# Altium PCB lv_controller.PcbDoc
Units mil, origin at the board's own origin, x right, y up, seen from the top; angles counter-clockwise.
Board outline 3360 x 3365 mil, 2 copper layers (Top Layer, Bottom Layer); 72 components, 59 nets, 282 pads, 68 vias.
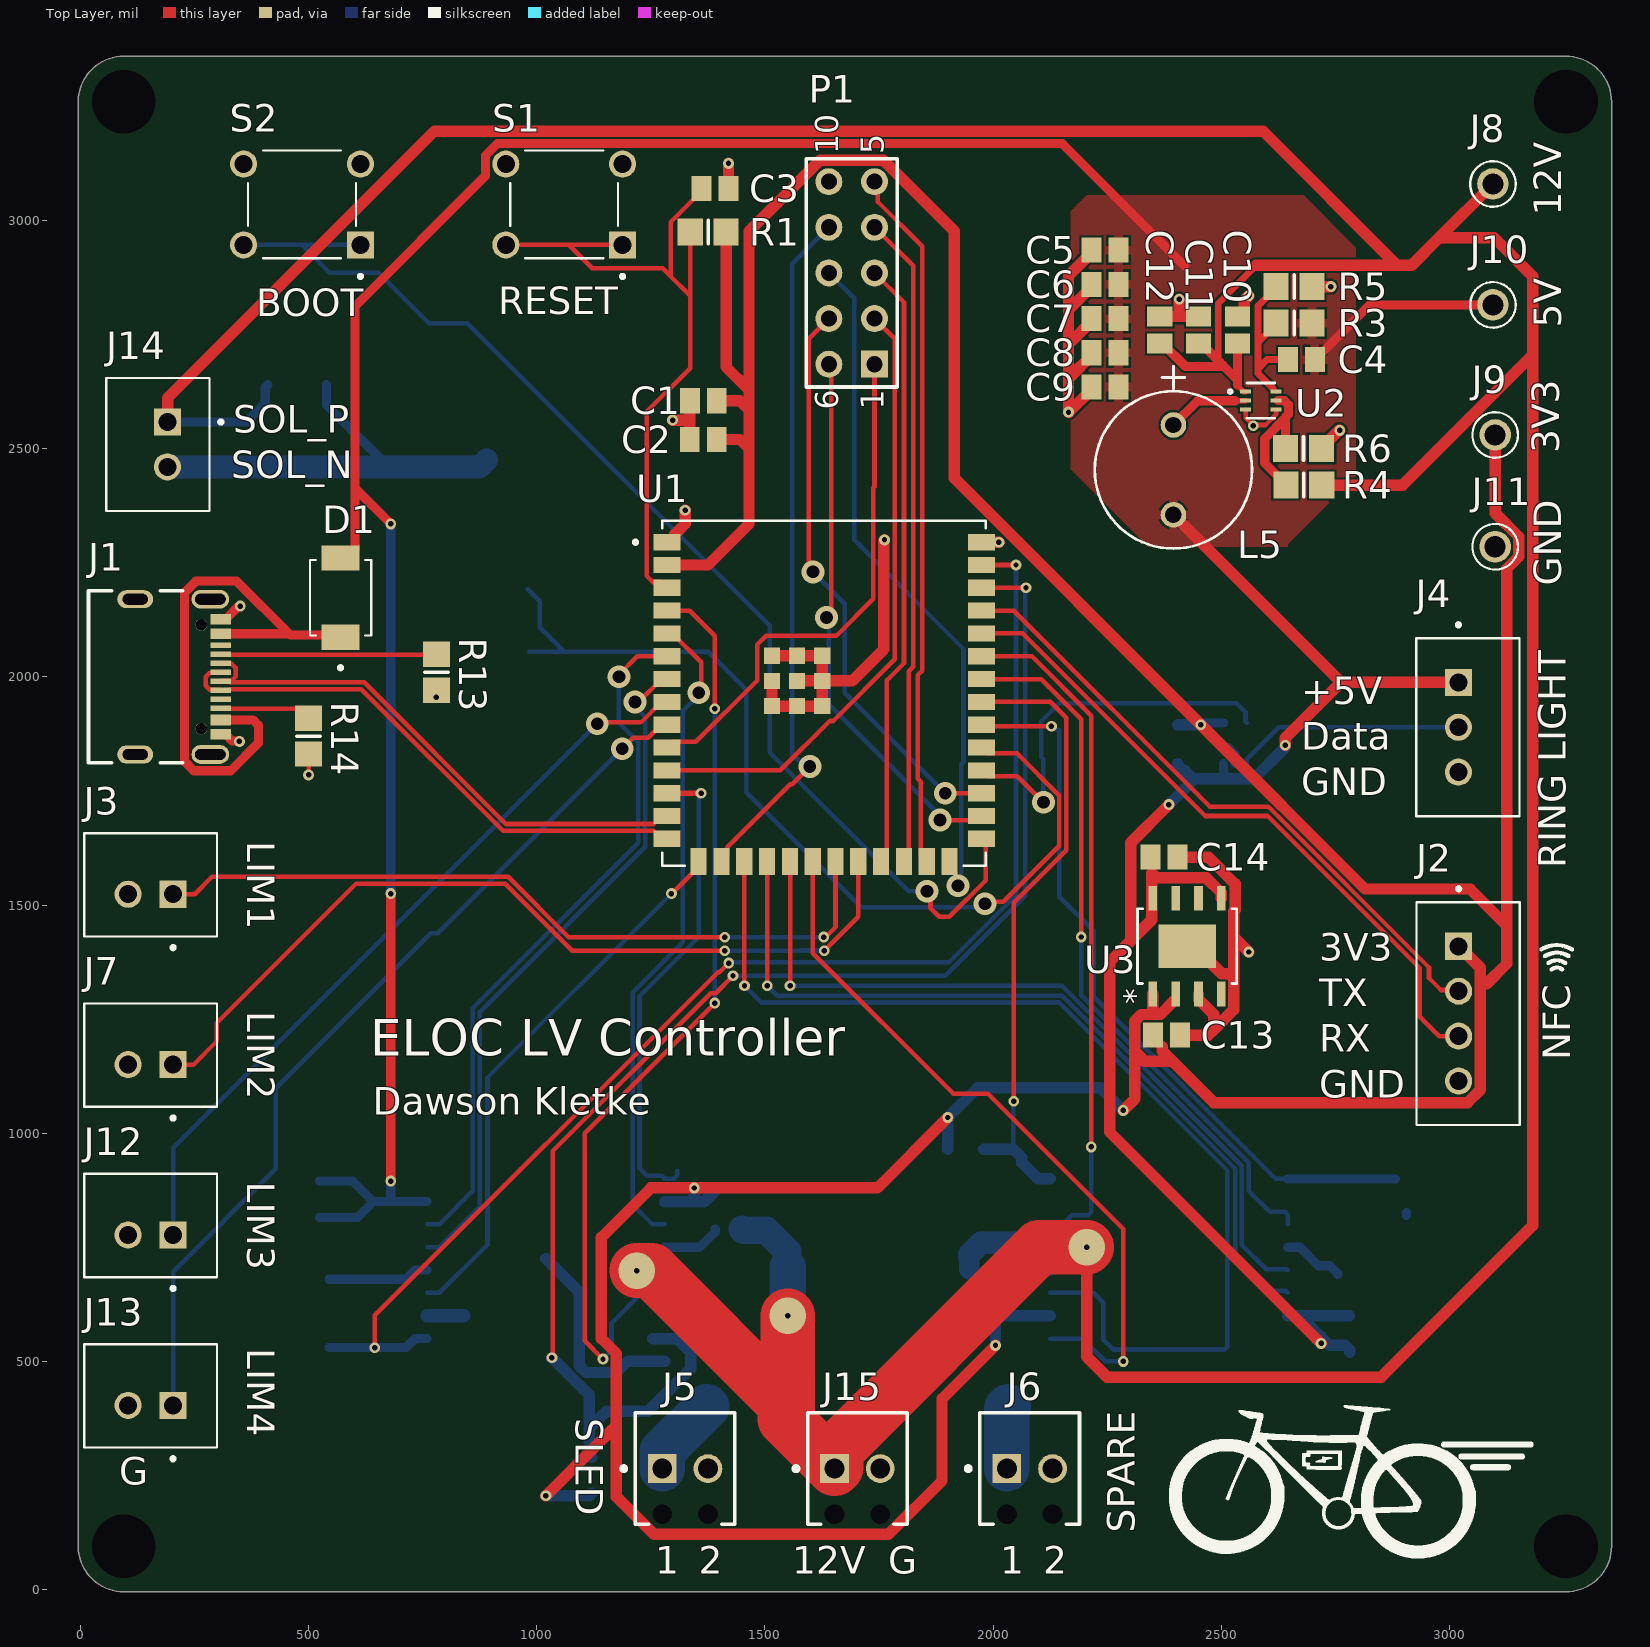
[diagram p0: Top Layer view]
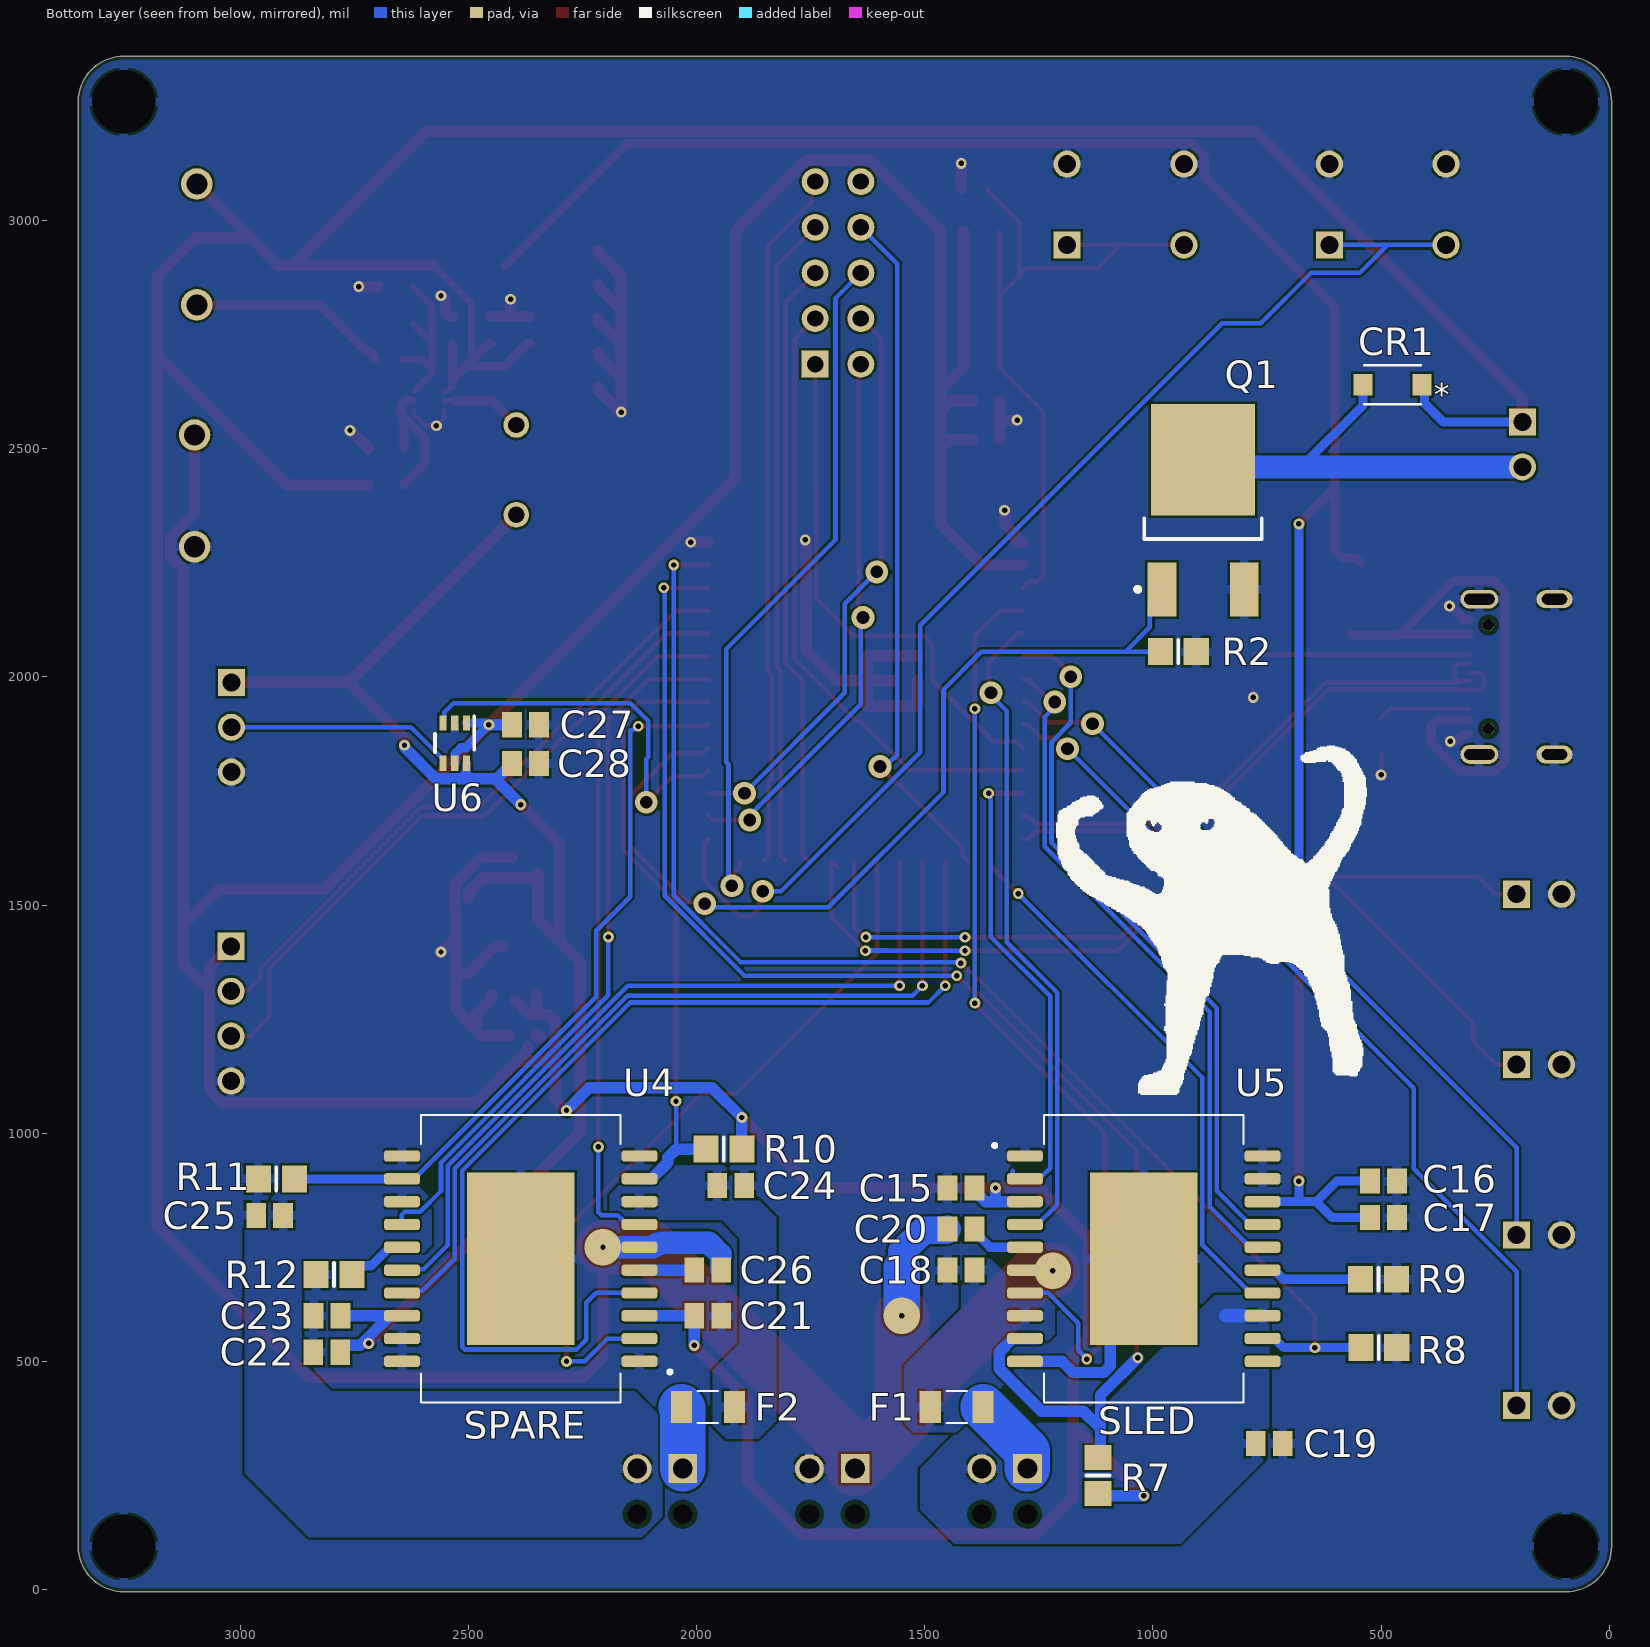
[diagram p1: Bottom Layer view, seen from below]

## Layer stack, top to bottom
Top Solder: solder mask 0.4, Solder Resist, Dk 3.5
Top Layer: signal copper 1.4
Dielectric 1: dielectric 12.6, FR-4, Dk 4.8
Bottom Layer: signal copper 1.4
Bottom Solder: solder mask 0.4, Solder Resist, Dk 3.5

## Board outline
95,-5 cw(c95,95) -5,95 -5,3260 cw(c95,3260) 95,3360 3255,3360 cw(c3255,3260) 3355,3260 3355,95 cw(c3255,95) 3255,-5

## Design rules (kind name [scope] priority, off if disabled: settings)
BoardOutlineClearance [All] p1: gap=7.87 ignorepadtopadclearanceinfootprint=FALSE
Clearance [All] p1: gap=5 ignorepadtopadclearanceinfootprint=FALSE except(9.84: Arc-Hole Track-Hole SMDPad-Hole THPad-Hole Via-Hole Fill-Hole Poly-Hole Region-Hole Text-Hole)
ComponentClearance [All] p1: gap=5 collisioncheckmode=3 verticalgap=5 showdistances=TRUE
DiffPairsRouting [All] p1: maxlimit=10 minlimit=5 mostfreqgap=5 toplayer_minwidth=5 toplayer_maxwidth=1000 toplayer_prefwidth=5 bottomlayer_minwidth=5 bottomlayer_maxwidth=1000 bottomlayer_prefwidth=5 maxuncoupledlength=500
Height [All] p1: minheight=0 maxheight=71497.94 prefheight=500
HoleSize [All] p1: absolutevalues=TRUE maxlimit=248.03 minlimit=11.81 maxpercent=80.000 minpercent=20.000
HoleToHoleClearance [All] p1: gap=9.84 allowstackedmicrovias=FALSE
MinimumAnnularRing [All] p1: minimumring=3
MinimumSolderMaskSliver [All] p1: minsoldermaskwidth=0
PlaneClearance [All] p1: clearance=5
PlaneConnect PlaneConnectPowerPads [InPadClass('PowerPads')] p1: planeconnectstyle=Direct reliefexpansion=20 reliefentries=4 reliefconductorwidth=10 reliefairgap=10
PlaneConnect [All] p2: pad.planeconnectstyle=Relief pad.reliefexpansion=11.81 pad.reliefentries=4 pad.reliefconductorwidth=5 pad.reliefairgap=5 via.planeconnectstyle=Direct via.reliefexpansion=11.81 via.reliefentries=4 via.reliefconductorwidth=5 via.reliefairgap=5
PolygonConnect PolygonConnectPowerPads [All vs (InPadClass('PowerPads'))] p1: connectstyle=Direct reliefconductorwidth=10 reliefentries=4 polygonreliefangle="90 Angle" airgapwidth=10
PolygonConnect [All] p2: thpad.connectstyle=Relief thpad.reliefconductorwidth=20 thpad.reliefentries=4 thpad.polygonreliefangle="90 Angle" thpad.airgapwidth=5 smdpad.connectstyle=Relief smdpad.reliefconductorwidth=20 smdpad.reliefentries=4 smdpad.polygonreliefangle="90 Angle" smdpad.airgapwidth=5 via.connectstyle=Direct via.reliefconductorwidth=5 via.reliefentries=4 via.polygonreliefangle="90 Angle" via.airgapwidth=5
RoutingVias [All] p1: holewidth=11.81 width=23.62 viastyle="Through Hole" minholewidth=11.81 minwidth=23.62 maxholewidth=23.62 maxwidth=259.84
SilkToSilkClearance [All] p1: silktosilkclearance=0
SilkToSolderMaskClearance [IsPad] p1: minsilkscreentomaskgap=5 clearancetoexposedcopper=TRUE
SolderMaskExpansion [All] p1: expansion=2.95 istentingtop=FALSE
Width [All] p1: maxlimit=1000 minlimit=5 preferedwidth=10 minimp=50.000000 maximp=50.000000 favimp=50.000000
20 further rules are at their usual default settings.

## Classes and differential pairs
component class lv_controller: C1 C2 C3 C27 C28 CR1 D1 F1 F2 J1 J2 J3 J4 J5 J6 J7 J12 J13 J14 P1 Q1 R1 R2 R13 R14 S1 S2 U1 U6
component class lv_controller_power: C4 C5 C6 C7 C8 C9 C10 C11 C12 C13 C14 J8 J9 J10 J11 J15 L5 R3 R4 R5 R6 U2 U3
component class lv_controller_motor_drivers: C15 C16 C17 C18 C19 C20 C21 C22 C23 C24 C25 C26 R7 R8 R9 R10 R11 R12 U U4 U5
differential pair USB_D: +USB_D_P -USB_D_N

## Components (designator, comment, footprint, x,y, rotation, side; value= is the part's Value field where it differs from the comment)
C1 "Cap" C0805 1365,2605 r0 top value=22uF
C2 "Cap" C0805 1364.53,2520 r0 top value=0.1uF
C3 "Cap" C0805 1390.47,3070 r180 top value=1uF
C4 "Cap" C0805 2675.47,2695 r0 top value=100pF
C5 "Cap" C0805 2245,2935 r0 top value=100pF
C6 "Cap" C0805 2245,2860 r0 top value=100pF
C7 "Cap" C0805 2245,2785 r0 top value=100pF
C8 "Cap" C0805 2245,2710 r0 top value=100pF
C9 "Cap" C0805 2245,2635 r0 top value=100pF
C10 "Cap" C0805 2535,2760 r270 top value=100pF
C11 "Cap" C0805 2450,2760 r270 top value=100pF
C12 "Cap" C0805 2365,2760 r270 top value=100pF
C13 "Cap" C0805 2380,1215 r180 top value=100pF
C14 "Cap" C0805 2374.53,1605 r180 top value=100pF
C15 "Cap" C0805 1420.47,880 r180 bottom value=100pF
C16 "Cap" C0805 494.53,895 r0 bottom value=100pF
C17 "Cap" C0805 494.53,815 r0 bottom value=100pF
C18 "Cap" C0805 1420.47,700 r180 bottom value=100pF
C19 "Cap" C0805 745,320 r0 bottom value=100pF
C20 "Cap" C0805 1420.47,790 r180 bottom value=100pF
C21 "Cap" C0805 1975.47,600 r0 bottom value=100pF
C22 "Cap" C0805 2810.47,520 r180 bottom value=100pF
C23 "Cap" C0805 2809.53,600 r180 bottom value=100pF
C24 "Cap" C0805 1925,885 r0 bottom value=100pF
C25 "Cap" C0805 2935.47,820 r180 bottom value=100pF
C26 "Cap" C0805 1975.47,700 r0 bottom value=100pF
C27 "Cap" C0805 2375,1895 r180 bottom value=1uF
C28 "Cap" C0805 2375,1810 r0 bottom value=1uF
CR1 "SS2FH10-M3/H, 100V @ 2A" CR_10-M3/H_VIS 475,2640 r0 bottom
D1 "D Schottky" SODFL4725X110N 570,2173.39 r90 top
F1 "C1F-8" FUSC3215X83N 1430,400 r180 bottom
F2 "C1F-8" FUSC3215X83N 1975,400 r0 bottom
J1 "USB4105-GF-A" GCT_USB4105-GF-A 120,2000 r270 top
J2 "PN532 NFC NXP RFID Module JST, est. btwn 150-250mA" JST_B4B-XH-A(LF)(SN) 3040.67,1261.89 r270 top
J3 "Limit Switch 1 JST" JST_B2B-XH-A(LF)(SN) 153.74,1523.64 r0 top
J4 "RGB Ring Light JST, 60mA/LEDx24=1.44 A" JST_B3B-XH-A(LF)(SN) 3040,1889.53 r270 top
J5 "Sled Motor Screw Terminal (16A rated)" PHOE-1725656-2 1325,265 r0 top
J6 "Spare Motor Screw Terminal" PHOE-1725656-2 2080,265 r0 top
J7 "Limit Switch 2 JST" JST_B2B-XH-A(LF)(SN) 153.74,1150.31 r0 top
J8 "+12V TP" KEYSTONE_5000 3095,3080 r90 top
J9 "+3.3V TP" KEYSTONE_5000 3100,2530 r90 top
J10 "+5V TP" KEYSTONE_5000 3095,2815 r90 top
J11 "GND TP" KEYSTONE_5000 3100,2285 r90 top
J12 "Limit Switch 3 JST" JST_B2B-XH-A(LF)(SN) 153.74,776.97 r0 top
J13 "Limit Switch 4 JST" JST_B2B-XH-A(LF)(SN) 153.74,403.64 r0 top
J14 "Solenoid Bolt Lock JST, 0.4A Nom" JST_B2B-XH-A(LF)(SN) 190.47,2509.21 r90 top
J15 "1725656" PHOE-1725656-2 1702.5,265 r0 top
L5 "RLB0913-2R2K, 2.2uH Inductor, 5.6A" RLB0913-4R7K_BRN 2395,2551.85 r270 top
P1 "Header 5X2A" HDR2X5_CEN 1740,2685 r90 top
Q1 "NTD14N03RT4G" ONSC-DPAK-3-369C-01_V 890,2365 r90 bottom
R1 "Res1" 6-0805_M 1375.47,2975 r180 top value=10K
R2 "Res1" 6-0805_M 944.37,2055 r180 bottom value=10K
R3 "Res1" 6-0805_M 2659.37,2775 r180 top value=1K
R4 "Res1" 6-0805_M 2680.63,2420 r180 top value=1K
R5 "Res1" 6-0805_M 2659.37,2855 r0 top value=1K
R6 "Res1" 6-0805_M 2680,2500 r0 top value=1K
R7 "Res1" 6-0805_M 1120,250 r90 bottom value=1K
R8 "Res1" 6-0805_M 505,530 r180 bottom value=1K
R9 "Res1" 6-0805_M 505.63,680 r180 bottom value=1K
R10 "Res1" 6-0805_M 1940,965 r0 bottom value=1K
R11 "Res1" 6-0805_M 2920.63,900 r0 bottom value=1K
R12 "Res1" 6-0805_M 2794.37,690 r0 bottom value=1K
R13 "Res1" 6-0805_M 780,2010 r90 top value=5.1K
R14 "Res1" 6-0805_M 500,1870 r90 top value=5.1K
S1 "TS02-66-60-BK-260-LCR-D" SW_TS02-66-60-BK-260-LCR-D 1060,3035 r180 top
S2 "TS02-66-60-BK-260-LCR-D" SW_TS02-66-60-BK-260-LCR-D 485.47,3035 r180 top
U1 "ESP32-S2-SOLO-U-N4" XCVR_ESP32-S2-SOLO-U-N4R2 1629.49,1963.9 r0 top
U2 "TPS566242DRLR" SOT5x3_DRL_TEX 2586.5,2605.31 r0 top
U3 "BD33HC5WEFJ-E2" HTSOP-J8_ROM 2425,1410 r90 top
U4 "L9958" SOIC127P1420X360-21N 2385.24,725 r0 bottom
U5 "L9958" SOIC127P1420X360-21N 1020,725 r180 bottom
U6 "TXS0101DCKR" DCK0006A_N 2530,1854.76 r270 bottom

## Footprints (in the part's own frame and the unit in brackets; to place one, negate y for a bottom-side part, rotate by r counter-clockwise, add the part's x,y. Pads: shape width x height; smd on the part's side, far side on the other; paste and mask are expansions set on the pad)
6-0805_M [mm] "Chip Resistor, Body 2.0x1.2mm, IPC Low Density"
  rect 1.4x1.5 smd: 1(-1,0) 2(1,0)
  silkscreen extent 0,-0.65 0,0.65, body extent -1.07,-0.7 1.07,0.7, height 0.7
C0805 [mm] "Chip Capacitor, Body 2.0x1.3mm, IPC High Density"
  rect 1.1x1.4 smd: 1(-0.75,0) 2(0.75,0)
  body extent -1.1,-0.72 1.1,0.72, height 1.4
CR_10-M3/H_VIS [mil]
  rect 41x47 smd paste+0 mask+0: 1(-64.5,0) 2(64.5,0)
  silkscreen extent -62,-42 62,42, body extent 0,0 10,10, height 10
DCK0006A_N [mm]
  rect 0.85x0.4 smd paste+0 mask+0.051: 1(-1.125,0.65) 2(-1.125,0) 3(-1.125,-0.65) 4(1.125,-0.65) 5(1.125,0) 6(1.125,0.65)
  silkscreen extent -1.5,-1.09 0.51,1.09, body extent 0,0 0.25,0.25, height 0.25
FUSC3215X83N [mm]
  rect 1.17x1.8 smd: 1(-1.47,0) 2(1.47,0)
  silkscreen extent -0.56,-0.89 0.56,0.89, body extent -1.6,-0.79 1.6,0.79, height 0.83
GCT_USB4105-GF-A [mm]
  rect 0.6x1.15 smd: A1_B12(-3.2,4.755) A4_B9(-2.4,4.755) B1_A12(3.2,4.755) B4_A9(2.4,4.755)
  rect 0.3x1.15 smd: A5(-1.25,4.755) A6(-0.25,4.755) A7(0.25,4.755) A8(1.25,4.755) B5(1.75,4.755) B6(0.75,4.755) B7(-0.75,4.755) B8(-1.75,4.755)
  oval 1.05x2.1 hole 0.6 slot 1.7 at 90 deg: S1(-4.32,4.18) S4(4.32,4.18)
  oval 1x2 hole 0.6 slot 1.4 at 90 deg: S2(-4.32,0) S3(4.32,0)
  round 0.65 hole 0.65 unplated: ""(-2.89,3.68) ""(2.89,3.68)
  silkscreen extent -4.79,-2.6 4.79,2.65, body extent -4.79,-2.6 4.79,5.11, height 3.31
HDR2X5_CEN [mm] "Connector; Header; 5x2 Position"
  rect 1.5x1.5 hole 0.9: 1(0,0)
  round 1.5 hole 0.9: 2(2.54,0) 3(5.08,0) 4(7.62,0) 5(10.16,0) 6(0,2.54) 7(2.54,2.54) 8(5.08,2.54) 9(7.62,2.54) 10(10.16,2.54)
  silkscreen extent -1.27,-1.27 11.43,3.81
HTSOP-J8_ROM [mil]
  rect 54x19 smd paste+0 mask+0: 1(-105,75) 2(-105,25) 3(-105,-25) 4(-105,-75) 5(105,-75) 6(105,-25) 7(105,25) 8(105,75)
  rect 95x126 smd paste-62.5 mask+0: EPAD(0,0)
  silkscreen extent -82,-108 82,108, body extent -118,-104 118,104, height 39
JST_B2B-XH-A(LF)(SN) [mm]
  rect 1.508x1.508 hole 1: 1(1.25,0)
  round 1.508 hole 1: 2(-1.25,0)
  silkscreen extent -3.7,-3.07 3.7,3.4, body extent -3.7,-2.88 3.7,2.88, height 7
JST_B3B-XH-A(LF)(SN) [mm]
  rect 1.508x1.508 hole 1: 1(-2.5,-0.525)
  round 1.508 hole 1: 2(0,-0.525) 3(2.5,-0.525)
  silkscreen extent -5.8,-2.87 4.95,2.88
JST_B4B-XH-A(LF)(SN) [mm]
  rect 1.508x1.508 hole 1: 1(-3.75,-0.525)
  round 1.508 hole 1: 2(-1.25,-0.525) 3(1.25,-0.525) 4(3.75,-0.525)
  silkscreen extent -7.05,-2.88 6.2,2.87
KEYSTONE_5000 [mm]
  round 1.755 hole 1.17: 1(0,0)
  silkscreen extent -1.27,-1.27 1.27,1.27
ONSC-DPAK-3-369C-01_V [mm] "DPAK, 3-Leads, Body 6.54x6.095mm, Pitch 2.29mm"
  rect 3x1.6 smd: 1(-4.4,2.29) 3(-4.4,-2.29)
  rect 6.2x5.8 smd: 4(2.8,0)
  silkscreen extent -4.52,-3.27 -0.45,3.77, body extent -1.6,-3.27 4.49,3.27, height 2.38
PHOE-1725656-2 [mm] "Connector, 2-Leads, Body 6.2x5.4mm, Pitch 2.54mm"
  rect 1.6x1.6 hole 1.1: 1(-1.27,0)
  round 1.6 hole 1.1: 2(1.27,0)
  round 0 hole 1.1 unplated: MH1(-1.27,-2.54) MH2(1.27,-2.54)
  silkscreen extent -3.54,-3.1 2.77,3.1, body extent -2.77,-3.1 2.77,3.1, height 9
RLB0913-4R7K_BRN [mil]
  round 56 hole 36 mask+0: 1(0,0) 2(196.85,0)
  silkscreen extent -129,-172 271,172, body extent -69,-167 267,167, height 493
SODFL4725X110N [mm]
  rect 1.4x2.1 smd paste-2: 1(-2.2,0) 2(2.2,0)
  silkscreen extent -4,-1.7 2.1,1.7
SOIC127P1420X360-21N [mm]
  rrect50% 1.99x0.63 smd: 1(-6.61,5.715) 2(-6.61,4.445) 3(-6.61,3.175) 4(-6.61,1.905) 5(-6.61,0.635) 6(-6.61,-0.635) 7(-6.61,-1.905) 8(-6.61,-3.175) 9(-6.61,-4.445) 10(-6.61,-5.715) 11(6.61,-5.715) 12(6.61,-4.445) 13(6.61,-3.175) 14(6.61,-1.905) 15(6.61,-0.635) 16(6.61,0.635) 17(6.61,1.905) 18(6.61,3.175) 19(6.61,4.445) 20(6.61,5.715)
  rect 6x9.6 smd paste-6: 21(0,0)
  silkscreen extent -8.4,-8 5.55,8
SOT5x3_DRL_TEX [mil]
  rect 24x9 smd paste+0 mask+0: 1(-33.5,19.69) 2(-33.5,0) 3(-33.5,-19.68) 4(33.5,-19.68) 5(33.5,0) 6(33.5,19.69)
  silkscreen extent -71,-38 30,38, body extent -34,-34 34,34, height 24
SW_TS02-66-60-BK-260-LCR-D [mm]
  rect 1.508x1.508 / inner round 1.508 / far side rect 1.508x1.508 hole 1: 1(-3.25,2.25)
  round 1.508 hole 1: 2(3.25,2.25) 3(-3.25,-2.25) 4(3.25,-2.25)
  silkscreen extent -3.35,-3 3,4.1
XCVR_ESP32-S2-SOLO-U-N4R2 [mm]
  rect 1.5x0.9 smd: 1(-8.75,8.41) 2(-8.75,7.14) 3(-8.75,5.87) 4(-8.75,4.6) 5(-8.75,3.33) 6(-8.75,2.06) 7(-8.75,0.79) 8(-8.75,-0.48) 9(-8.75,-1.75) 10(-8.75,-3.02) 11(-8.75,-4.29) 12(-8.75,-5.56) 13(-8.75,-6.83) 14(-8.75,-8.1) 27(8.75,-8.1) 28(8.75,-6.83) 29(8.75,-5.56) 30(8.75,-4.29) 31(8.75,-3.02) 32(8.75,-1.75) 33(8.75,-0.48) 34(8.75,0.79) 35(8.75,2.06) 36(8.75,3.33) 37(8.75,4.6) 38(8.75,5.87) 39(8.75,7.14) 40(8.75,8.41)
  rect 0.9x1.5 smd: 15(-6.985,-9.35) 16(-5.715,-9.35) 17(-4.445,-9.35) 18(-3.175,-9.35) 19(-1.905,-9.35) 20(-0.635,-9.35) 21(0.635,-9.35) 22(1.905,-9.35) 23(3.175,-9.35) 24(4.445,-9.35) 25(5.715,-9.35) 26(6.985,-9.35)
  rect 0.9x0.9 smd: 41_1(-2.9,2.09) 41_2(-1.5,2.09) 41_3(-0.1,2.09) 41_4(-2.9,0.69) 41_5(-1.5,0.69) 41_6(-0.1,0.69) 41_7(-2.9,-0.71) 41_8(-1.5,-0.71) 41_9(-0.1,-0.71)
  silkscreen extent -10.6,-9.6 9,9.6

## Part data
C1 C2 C3 C4 C5 C6 C7 C8 C9 C10 C11 C12 C13 C14 C15 C16 C17 C18 C19 C20 C21 C22 C23 C24 C25 C26 C27 C28: "Capacitor", LatestRevisionDate=17-Jul-2002, LatestRevisionNote="Re-released for DXP Platform.", PackageDescription="Radial Cap, Thru-Hole; 2 Leads; 0.3 in Pin Spacing", PackageReference=RAD-0.3, Published=8-Jun-2000, Publisher="Altium Limited"
CR1: library part SS2FH10-M3/H, "No Description Available", Mfr_Name=Vishay, Copyright="Copyright (C) 2022 Ultra Librarian. All rights reserved.", Manufacturer_Part_Number=SS2FH10-M3/H, RefDes=RefDes, Type=DEV
D1: "Schottky Diode", Code_JEDEC=DO-214-AA, LatestRevisionDate=17-Jul-2002, LatestRevisionNote="Re-released for DXP Platform.", PackageDescription="DO-214-AA/SMB; 2 C-Bend Leads; Body 5.3 x 3.6 mm, inc. leads (LxW)", PackageReference=SMB, Published=8-Jun-2000, Publisher="Altium Limited"
F1 F2: "C1F 8 (0685F8000-01)", Package="1206 Bel Fuse", Availability=Unavailable, Check_prices=https://www.snapeda.com/parts/C1F-8/Bel%20Fuse/view-part/4620009/?ref=eda, MF="Bel Fuse", MP=C1F-8, Price=None, SnapEDA_Link=https://www.snapeda.com/parts/C1F-8/Bel%20Fuse/view-part/4620009/?ref=snap
J1: "USB-C (USB TYPE-C) USB 2.0 Receptacle Connector 24 (16+8 Dummy) Position Surface Mount, Right Angle; Through Hole", Package=None, Availability="In Stock", Check_prices=https://www.snapeda.com/parts/USB4105-GF-A/Global+Connector+Technology/view-part/?ref=eda, MF=GCT, MP=USB4105-GF-A, Price=None, Purchase-URL=https://pricing.snapeda.com/search/part/USB4105-GF-A/?ref=eda, SnapEDA_Link=https://www.snapeda.com/parts/USB4105-GF-A/Global+Connector+Technology/view-part/?ref=snap
J2: library part B4B-XH-A(LF)(SN), Package=None, Availability=Unavailable, MP=B4B-XH-A(LF)(SN), Price=None
J3 J7 J12 J13 J14: library part B2B-XH-A(LF)(SN), "Connector Header Through Hole 2 position 0.098 (2.50mm)", Package=None, Availability="In Stock", Check_prices=https://www.snapeda.com/parts/B2B-XH-A(LF)(SN)/JST+Sales+America+Inc./view-part/?ref=eda, MF="JST Sales", MP=B2B-XH-A(LF)(SN), Price=None, Purchase-URL=https://pricing.snapeda.com/search/part/B2B-XH-A(LF)(SN)/?ref=eda, SnapEDA_Link=https://www.snapeda.com/parts/B2B-XH-A(LF)(SN)/JST+Sales+America+Inc./view-part/?ref=snap
J4: library part B3B-XH-A(LF)(SN), Package=None, Availability=Unavailable, MP=B3B-XH-A(LF)(SN), Price=None
J5 J6: library part CMP-2000-05299-1, "Male Header, Pitch 2.54 mm, 1 x 2 Position, Height 9 mm, Tail Length 3.5 mm", Colour=Green, Manufacturer="Phoenix Contact", Manufacturer part No.=1725656, Content=250pc(s), Datasheet URL=http://datasheet.octopart.com/1725656-Phoenix-Contact-datasheet-5302866.pdf, Datasheet Version=Apr-08, Industrial packaging=Yes, Manufacturer URL=http://www.phoenixcontact.com/, Number of contacts=2, Pitch=2.54mm, Type=MPT0,5/2-2,54
J8 J9 J10 J11: library part 5000, "High Pin Count, Backplane Connectors, Receptacle, Right Angle, Through Hole, 4 Row, 120 Positions, 0 Guide Pin, 2.54mm (0.100in) Pitch", Package="Custom Package Ohmite", Availability=Good, Check_prices=https://www.snapeda.com/parts/5000/Keystone/view-part/883846/?ref=eda, MF=Keystone, MP=5000, Price=None, Purchase-URL=https://pricing.snapeda.com/search/part/5000/?ref=eda, SnapEDA_Link=https://www.snapeda.com/parts/5000/Keystone/view-part/883846/?ref=snap
J15: library part CMP-2000-05299-1, "Male Header, Pitch 2.54 mm, 1 x 2 Position, Height 9 mm, Tail Length 3.5 mm", Colour=Green, Manufacturer="Phoenix Contact", Content=250pc(s), Datasheet URL=http://datasheet.octopart.com/1725656-Phoenix-Contact-datasheet-5302866.pdf, Datasheet Version=Apr-08, Industrial packaging=Yes, Manufacturer part No.=1725656, Manufacturer URL=http://www.phoenixcontact.com/, Number of contacts=2, Pitch=2.54mm, Type=MPT0,5/2-2,54
L5: library part RLB0913-4R7K, "No Description Available", Mfr_Name="Bourns Electronics", Copyright="Copyright (C) 2022 Ultra Librarian. All rights reserved.", Manufacturer_Part_Number=RLB0913-4R7K, RefDes=RefDes, Type=DEV
P1: "Header, 5-Pin, Dual row", LatestRevisionDate=17-Jul-2002, LatestRevisionNote="Re-released for DXP Platform.", Publisher="Altium Limited"
Q1: library part CMP-1058-00361-1, "Power MOSFET, 14 A, 25 V, N-Channel, 3-Pin DPAK, Pb-Free, Tape and Reel", Manufacturer="On Semiconductor", Package Type=DPAK-3, Channel Polarity="N Channel", Ciss Typ (pF)=115, ComponentLink1Description="Manufacturer URL", ComponentLink1URL=http://www.onsemi.com/, ComponentLink2Description=Datasheet, ComponentLink2URL=http://www.onsemi.cn/pub_link/Collateral/NTD14N03R-D.PDF, ComponentLink3Description="Package Specification", ComponentLink3URL=http://www.onsemi.cn/pub_link/Collateral/369C.PDF, Configuration=Single, Coss Typ (pF)=62, Crss Typ (pF)=33, DatasheetVersion="Rev. 7", Mounting Technology="Surface Mount", PackageDescription="3-Pin Flange Mount, Body 6.54 x 6.095 mm, Pitch 2.29 mm", PackageReference=DPAK-3-369C-01, PackageVersion="Rev. E, 02/2014", Packing="Tape and Reel", PartNumber=NTD14N03RT4G, Qrr Typ (nC)=2, RoHS=Pb-Free, V(BR)DSS Min (V)=25, VGS Max (V)=20, VGS(th) Max (V)=2
R1 R2 R3 R4 R5 R6 R7 R8 R9 R10 R11 R12 R13 R14: "Resistor", LatestRevisionDate=17-Jul-2002, LatestRevisionNote="Re-released for DXP Platform.", PackageDescription="Axial Device, Thru-Hole; 2 Leads; 0.3 in Pin Spacing", PackageReference=AXIAL-0.3, Published=8-Jun-2000, Publisher="Altium Limited"
S1 S2: "6 x 6 mm, 6 mm Actuator Height, 260 gf, Black, Long Crimped, Through Hole, SPST, Tactile Switch", Package=None, Availability="In Stock", Check_prices=https://www.snapeda.com/parts/TS02-66-60-BK-260-LCR-D/CUI+Devices/view-part/?ref=eda, CUI_purchase_URL=https://www.cuidevices.com/product/switches/tactile-switches/ts02-series?utm_source=snapeda.com&utm_medium=referral&utm_campaign=snapedaBOM, MF="CUI Devices", MP=TS02-66-60-BK-260-LCR-D, Price=None, Purchase-URL=https://pricing.snapeda.com/search/part/TS02-66-60-BK-260-LCR-D/?ref=eda, SnapEDA_Link=https://www.snapeda.com/parts/TS02-66-60-BK-260-LCR-D/CUI+Devices/view-part/?ref=snap
U1: library part ESP32-S2-SOLO-U-N4R2, "WiFi 802.11b/g/n Transceiver Module 2.4GHz PCB Trace + IPEX Surface Mount", Package="SMD-40 Espressif Systems", Availability="In Stock", Check_prices=https://www.snapeda.com/parts/ESP32-S2-SOLO-U-N4R2/Espressif+Systems/view-part/?ref=eda, MF="Espressif Systems", MP=ESP32-S2-SOLO-U-N4R2, Price=None, Purchase-URL=https://pricing.snapeda.com/search/part/ESP32-S2-SOLO-U-N4R2/?ref=eda, SnapEDA_Link=https://www.snapeda.com/parts/ESP32-S2-SOLO-U-N4R2/Espressif+Systems/view-part/?ref=snap
U2 U6: "No Description Available", Mfr_Name="Texas Instruments", Copyright="Copyright (C) 2022 Ultra Librarian. All rights reserved.", RefDes=RefDes, Type=DEV
  U2: Manufacturer_Part_Number=TPS566242DRLR
  U6: Manufacturer_Part_Number=TXS0101DCKR
U3: "No Description Available", Mfr_Name="ROHM Semiconductor", Copyright="Copyright (C) 2022 Ultra Librarian. All rights reserved.", Manufacturer_Part_Number=BD33HC5WEFJ-E2, RefDes=RefDes, Type=DEV
U4 U5: "Bipolar Motor Driver CMOS SPI PowerSO-16â„¢", Package="SO-20 STMicroelectronics", Availability=Unavailable, MF=STMicroelectronics, MP=L9958, Price=None, SnapEDA_Link=https://www.snapeda.com/parts/L9958/STMicroelectronics/view-part/213961/?ref=snap

## Free pads (board coordinates)
  round 60 hole 140: 2(95,95) 2(95,3260) 2(3255,95) 2(3255,3260)

## Via types
v1: diameter 23.62, hole 11.81, Top Layer to Bottom Layer, 51 vias
v2: diameter 50, hole 28, Top Layer to Bottom Layer, 14 vias
v3: diameter 80, hole 11.81, Top Layer to Bottom Layer, 3 vias

## Nets (pads, with @x,y where several pads share a name; then routed paths per layer and width w, separated by ;. In a path a pad name is that pad's centre, name@x,y a point inside that pad or via, vN(x,y) a via of type N, cw(c..) or ccw(c..) an arc to the next point about the centre after c; other vN are vias at no path point)
+3V3: C1.2 C2.2 C13.2 C15.2 C21.2 C27.1 J2.1 J9.1 R1.1 R7.1 R10.1 U1.2 U3.1 U3.2 U4.3 U5.3 U6.1 U6.5 | length 10933.3
  Top Layer w25: v1(1020,205.63) 1174.31,359.94 ; U1.2 1375,2245 1465,2335 1465,2500 ; C2.2 1445,2520 1465,2500 ; C1.2 1445,2605 1465,2585 ; R1.1 1414.84,2679.09 1465,2628.94 ; v1(1900.63,1034.37) 1746.26,880 v1(1345,880) 1250,880 1141.6,771.6 1141.6,549.85 1174.31,517.14 1174.31,359.94 ; v1(2005,535) 1887.86,417.86 1887.86,238.14 1770.72,121 1256.78,121 1174.31,203.47 1174.31,359.94 ; v1(2285,1050) 2310,1075 2310,1180 ; C13.2@2341.32,1209.09 C13.2@2350,1217.78 ; U3.1 2350,1260 ; C13.2@2350.47,1209.09 C13.2 ; C13.2@2370.37,1189.19 2370.37,1180.19 2392.78,1157.78 ; U3.2@2397,1290.5 2366.5,1260 2350,1260 ; J2.1 3067.19,1362.34 3067.19,1320 ; J9.1 3100,2358.61 3152.05,2306.56 3152.05,2263.44 3125,2236.39 3125,1455 ; 1465,2500 1465,2585 ; 1465,2585 1465,2628.94 ; 1465,2628.94 1465,2976.51 1620.52,3132.03 1759.48,3132.03 1915,2976.51 1915,2435 v1(2455,1895) 2815,1535 3045,1535 3125,1455 ; 2310,1180 2310,1245.36 2324.64,1260 2350,1260 ; 2310,1180 2332.22,1157.78 2392.78,1157.78 ; 2392.78,1157.78 2483.5,1067.07 3039.54,1067.07 3067.19,1094.71 3067.19,1320 ; 3067.19,1320 3074.69,1327.5 3081.62,1327.5 3125,1370.88 3125,1455
  Bottom Layer w20: U6.1 2460.04,1899.06 2455.98,1895 v1(2455,1895) 2505.3,1844.7 2516,1844.7 2529.41,1831.29 2529.41,1811.06 U6.5
  Bottom Layer w25: v1(1020,205.63) 1115,205.63 R7.1 ; U5.3 1345,850 ; v1(1345,880) 1345,850 ; C15.2 1390.94,874.09 1366.85,850 1345,850 ; R10.1 v1(1900.63,1034.37) 1965.57,1099.31 2235.69,1099.31 v1(2285,1050) ; v1(2005,535) C21.2 U4.3 ; C27.1 v1(2455,1895)
+5: C4.2 C5.2 C6.2 C7.2 C8.2 C9.2 C14.2 C16.2 C17.2 C22.2 C23.2 C28.2 D1.2 J4.1 J10.1 L5.2 R3.1 U3.5 U3.8 U4.18 U5.18 U6.6 | length 8579
  Top Layer w20: D1.2@545,2250 555,2260 D1.2 583.78,2260 601.34,2277.56 601.34,2413.66 ; v1(680,895) v1(680,1525) ; v1(680,2335) 601.34,2413.66 ; 2420,2900 2151.73,3168.27 913.54,3168.27 887.36,3142.09 887.36,3097.36 601.34,2811.34 601.34,2413.66 ; C4.2 2705,2700.91 2716.65,2712.56 2722.56,2712.56 2825,2815 J10.1
  Top Layer w25: v1(2385,1720) 2301.25,1636.25 2301.25,1421.5 ; L5.2 2762.05,1987.95 ; U3.5 2500,1526.5 2466.56,1559.94 2357.56,1559.94 2347.5,1570 2347.5,1467.75 2301.25,1421.5 ; v1(2640,1850) 2640,1865.9 2762.05,1987.95 ; v1(2718.52,539.31) 2255,1002.83 2255,1375.25 2301.25,1421.5 ; J4.1 2762.05,1987.95
  Bottom Layer w20: C17.2 606.87,815 641.87,850 ; C16.2 596.87,895 641.87,850 ; v1(680,895) 680,850 ; v1(680,1525) v1(680,2335) ; U5.18 680,850 ; U6.6 2504.41,1790.24 2515.91,1778.74 2522.5,1778.74 2525,1776.24 ; 641.87,850 680,850
  Bottom Layer w25: v1(2385,1720) 2441.24,1776.24 ; C28.2 2404.53,1804.09 2413.68,1794.94 2419.59,1794.94 2438.29,1776.24 2441.24,1776.24 ; v1(2640,1850) 2640,1845.53 2570.71,1776.24 2525,1776.24 2441.24,1776.24 ; U4.18 U4.18@2672.05,600 ; v1(2718.52,539.31) 2718.52,553.52 ; C23.2 U4.18@2672.05,600 ; C22.2 2780.94,525.91 2771.79,535.06 2736.99,535.06 2718.52,553.52 ; U4.18@2672.05,600 2718.52,553.52
GND: C1.1 C2.1 C3.1 C5.1 C6.1 C7.1 C8.1 C9.1 C10.1 C11.1 C12.1 C13.1 C14.1 C15.1 C16.1 C17.1 C18.1 C19.1 C21.1 C22.1 C23.1 C24.1 C25.1 C27.2 C28.1 J1.A1_B12 J1.B1_A12 J1.S1 J1.S2 J1.S3 J1.S4 J2.4 J3.2 J4.3 J7.2 J11.1 J12.2 J13.2 J15.2 pad.2 Q1.3 R2.2 R5.2 R6.2 R8.2 R9.2 R11.2 R12.2 R13.1 R14.1 S1.3 S1.4 S2.3 S2.4 U1.1 U1.40 U1.41_1 U1.41_2 U1.41_3 U1.41_4 U1.41_5 U1.41_6 U1.41_7 U1.41_8 U1.41_9 U2.3 U2.4 U3.3 U3.EPAD U4.1 U4.10 U4.11 U4.19 U4.20 U4.21 U5.1 U5.10 U5.11 U5.19 U5.20 U5.21 U6.2 | length 3698.1
  Top Layer w10: v1(500,1785) R14.1 ; v1(780,1954.88) R13.1 ; U2.3 2553,2567 v1(2570,2550) 2571.81,2551.81 2596.81,2551.81 2620,2575 U2.4@2620,2585.16
  Top Layer w20: J1.B1_A12 318.03,1874.02 332.81,1859.24 347.58,1859.24 v1(348.27,1858.54) ; J1.A1_B12 318.03,2125.98 346.35,2154.31 349.31,2154.31 v1(350,2155)
  Top Layer w25: U1.1 1296.81,2295 1302.03,2300.22 1302.03,2312.03 1325,2335 v1(1325,2365) ; v1(1297.5,2562.5) 1335.24,2562.5 ; C2.1 1335.24,2520.24 1335.24,2562.5 ; C1.1 1335.24,2604.76 1335.24,2562.5 ; C3.1 v1(1420,3125) ; U1.41_4 U1.41_7 U1.41_8 U1.41_9 U1.41_6 ; U1.41_1 U1.41_2 U1.41_3 U1.41_6 ; U1.41_5 U1.41_6 ; v1(1761.81,2300) 1760,2298.19 1760,2060 1691.06,1991.06 U1.41_6 ; U1.40 v1(2012.57,2295) ; C9.1 2215.47,2629.09 2166.38,2580 v1(2165,2580) 2165,2657.5 ; C8.1 2215.47,2704.09 2168.88,2657.5 2165,2657.5 ; C7.1 2215.47,2779.09 2171.38,2735 2165,2735 ; C6.1 2215.47,2854.09 2166.38,2805 2165,2805 ; C5.1 2215.47,2929.09 2165,2878.62 2165,2805 ; C12.1 2407.5,2789.53 ; C14.1 2471.25,1605 2530,1546.25 2530,1489.62 2527,1486.62 2527,1430 ; v1(2407.5,2827.5) 2407.5,2789.53 ; C13.1 2471.25,1215 2483.12,1226.88 ; U3.EPAD 2440.5,1410 2501,1349.5 2516.75,1349.5 2527,1339.25 ; U3.3 2450,1293.5 2483.12,1260.38 2483.12,1226.88 ; C11.1 2407.5,2789.53 ; C10.1 2540.91,2789.53 2550.06,2798.68 2550.06,2825.06 v1(2560,2835) ; v1(2560,1397) 2527,1430 ; R5.2 v1(2740,2855) ; R6.2 2719.37,2501.97 2757.4,2540 v1(2759.37,2540) ; 2165,2657.5 2165,2735 ; 2165,2735 2165,2805 ; 2483.12,1226.88 2527,1270.75 2527,1339.25 ; 2527,1339.25 2527,1430
  Bottom Layer w25: U5.21 1093.14,651.86 1093.14,490.33 1107.79,475.69 1174.61,475.69 1198.92,500 U5.10
GPIO17: P1.1 U1.10 | length 1148.5
  Top Layer w10: U1.10 1297.72,1857.72 1348.56,1857.72 1482.6,1991.75 1482.6,2070.11 1502.49,2090 1656.57,2090 1737.5,2170.93 1737.5,2414.45 1740,2416.95 P1.1
GPIO18: P1.2 U1.11 | length 1365.5
  Top Layer w10: U1.11 1533.43,1795 1641.66,1903.23 1649.48,1903.23 1784.53,2038.27 1784.53,2740.47 P1.2
GPIO21: P1.3 U1.23 | length 1336.7
  Top Layer w10: P1.3 1804.53,2820.47 1804.53,2029.99 1767.2,1992.67 1767.2,1608.5 U1.23
GPIO33: P1.4 U1.24 | length 1432.5
  Top Layer w10: P1.4 1824.53,2900.47 1824.53,2021.7 1815,2012.18 1815,1606.3 U1.24
GPIO34: P1.5 U1.25 | length 1544.5
  Top Layer w10: P1.5 1747.5,3077.5 1747.5,3040.47 1844.53,2943.44 1844.53,2013.42 1835,2003.89 1835,1776.72 1841.77,1769.94 1841.77,1608.5 U1.25
GPIO35: P1.6 U1.28 | length 1202.3
  Top Layer w10: v2(1635,2130) 1635,2140.82 1645,2150.82 1645,2680 P1.6 ; v2(1883.23,1686.17) 1965.14,1686.17 U1.28
  Bottom Layer w10: v2(1635,2130) 1640,2125 1640,1940 1883.23,1696.77 v2(1883.23,1686.17)
GPIO36: P1.7 U1.29 | length 1261.5
  Top Layer w10: v2(1605,2230) 1605,2240.82 1595.47,2250.35 1595.47,2740.47 P1.7 ; v2(1895,1745) U1.29
  Bottom Layer w10: v2(1605,2230) 1675,2160 1675,1965 v2(1895,1745)
GPIO45: P1.8 U1.26 | length 1530.9
  Top Layer w10: U1.26 1904.49,1583.98 1917.2,1571.26 1917.2,1547.8 v2(1922.65,1542.35)
  Bottom Layer w10: P1.8 1695.47,2829.53 1695.47,2300.39 1935,2060.86 1935,1813.2 1930,1808.2 1930,1549.71 v2(1922.65,1542.35)
GPIO46: P1.9 U1.16 | length 1528.8
  Top Layer w10: U1.16 1417.2,1608.5 1417.2,1626.96 1555.24,1765 1560,1765 v2(1598.28,1803.28)
  Bottom Layer w10: v2(1598.28,1803.28) 1587.46,1803.28 1569.18,1821.57 1567.07,1821.57 1560,1828.64 1560,2905 P1.9
HSU_RX: J2.3 U1.36 | length 1474.2
  Top Layer w10: U1.36 2065,2095 2465,1695 2601.97,1695 2935,1361.97 2935,1255 2977.32,1212.68 J2.3
HSU_TX: J2.2 U1.37 | length 1405
  Top Layer w10: U1.37 2045,2145 2475,1715 2603.18,1715 2955,1363.18 2955,1340 2981.17,1313.83 3017.27,1313.83 J2.2
LIM_SW_1: J3.1 U1.21 | length 1675.5
  Top Layer w10: J3.1 250.21,1523.64 288.38,1561.81 937.02,1561.81 1069.38,1429.46 v1(1411.81,1429.46) ; v1(1628.89,1429.73) 1632.57,1429.73 1654.49,1451.65 U1.21
  Bottom Layer w10: v1(1411.81,1429.46) 1411.95,1429.6 1628.75,1429.6 v1(1628.89,1429.73)
LIM_SW_2: J7.1 U1.22 | length 1920.5
  Top Layer w10: J7.1 247.64,1150.31 298.21,1200.88 298.21,1241.09 603.93,1546.81 930.81,1546.81 1077.62,1400 v1(1411.81,1400) ; v1(1630,1400) 1704.49,1474.49 U1.22 U1.22@1691.77,1583.07
  Bottom Layer w10: v1(1411.81,1400) 1580,1400 1580.28,1400.28 1629.72,1400.28 v1(1630,1400)
LIM_SW_3: J12.1 U1.8 | length 1677.7
  Top Layer w10: v2(1132.25,1897.25) 1135,1900 1228.19,1900 1273.19,1945 U1.8
  Bottom Layer w10: J12.1 202.95,967.95 v2(1132.25,1897.25)
LIM_SW_4: J13.1 U1.9 | length 1974.7
  Top Layer w10: v2(1187.25,1842.25) 1187.52,1842.25 1211.53,1866.25 1244.44,1866.25 1273.19,1895 U1.9
  Bottom Layer w10: J13.1 202.95,696.39 428.35,921.79 428.35,1098.35 767.85,1437.85 782.85,1437.85 v2(1187.25,1842.25)
MCU_BOOT: S2.1 S2.2 U1.27 | length 2651.2
  Top Layer w10: v2(1855,1530.2) 1862.65,1522.55 1862.65,1493.17 1881.64,1474.18 1903.98,1474.18 1983.43,1553.63 1983.43,1635.55 U1.27
  Bottom Layer w10: S2.2 485,2946.42 ; S2.1@592.21,2946.42 485,2946.42 ; v2(1855,1530.2) 1854.8,1530 1815,1530 1510,1835 1510,2112.67 847.71,2774.96 763.67,2774.96 653.63,2885 546.42,2885 485,2946.42
MCU_EN: C3.2 R1.2 S1.1 S1.2 U1.3 | length 1637.1
  Top Layer w10: S1.2 1070,2946.42 ; S1.1 1070,2946.42 ; U1.3 1272.28,2207.72 1253.83,2207.72 1240.47,2221.07 1240.47,2580.43 1336.1,2676.06 1336.1,2835 ; R1.2 1336.1,2835 ; C3.2 1360.94,3064.09 1293.05,2996.2 1293.05,2878.05 ; 1070,2946.42 1121.42,2895 1276.1,2895 1293.05,2878.05 ; 1293.05,2878.05 1336.1,2835
NetC4_1: C4.1 R3.2 R5.1 U2.6 | length 395.9
  Top Layer w10: 2613,2632 U2.6 ; R3.2@2620,2773.03 R3.2 ; R5.1@2620,2853.03 R5.1
  Top Layer w15: 2613,2632 2580,2665 2580,2675 ; R3.2@2620,2773.03 2580,2733.03 ; R5.1@2620,2853.03 2580,2813.03 2580,2733.03 ; C4.1 2600,2695 2580,2675 ; 2580,2675 2580,2733.03
NetC18_2: C18.2 F1.1 U5.8
NetC19_2: C19.2 J5.2 U5.13 | length 80.2
  Bottom Layer w30: U5.13 840,600
NetC20_2: C20.2 U5.5 | length 130.7
  Bottom Layer w20: U5.5 1356.85,750 1390.94,784.09 C20.2
NetC24_2: C24.2 F2.1 U4.8
NetC25_2: C25.2 J6.2 U4.13 | length 5.9
  Bottom Layer w20: C25.2 C25.2@2905.94,825.91
NetC26_2: C26.2 U4.5 | length 120
  Bottom Layer w25: C26.2 U4.5
NetF1_2: F1.2 J5.1 | length 175.2
  Bottom Layer w100: J5.1 1275,302.87 F1.2
NetF2_2: F2.2 J6.1 | length 136.2
  Bottom Layer w100: J6.1 2030,397.13 F2.2
NetJ1_A5: J1.A5 R13.2 | length 473.2
  Top Layer w10: J1.A5@307.32,2047.99 778.62,2047.99 R13.2
NetJ1_B5: J1.B5 R14.2 | length 201.2
  Top Layer w10: J1.B5@307.32,1929.88 479.49,1929.88 R14.2
NetL5_1: L5.1 U2.2 | length 180.1
  Top Layer w12: 2530,2605 2552.69,2605 U2.2
  Top Layer w20: L5.1 2448.15,2605 2530,2605
NetR4_2: R4.2 R6.1 U2.5 | length 312.3
  Top Layer w20: U2.5@2623.99,2605.16 2638.18,2605.16 2647,2596.34 2647,2574.92 2640.63,2568.55 ; R6.1 2640.63,2568.55 ; R4.2 2641.26,2421.97 2595,2468.23 2595,2521.72 2640.63,2567.35 2640.63,2568.55
NetR7_2: R7.2 U1.38 U5.9 | length 3156.7
  Top Layer w10: v1(1033.02,508.02) 1035,510 1035,960.85 1380.97,1306.81 1391.81,1306.81 v1(1430,1345) ; U1.38 v1(2071.81,2195)
  Bottom Layer w10: v1(1430,1345) 1895,1345 2070,1520 2070,2193.19 v1(2071.81,2195)
  Bottom Layer w25: v1(1033.02,508.02) 1114.74,426.3 1114.74,352.78 ; R7.2 1114.74,294.63 1114.74,352.78 ; U5.9@1253.66,550 U5.9 1306.81,550 1336.91,519.9 1336.91,483.98 1243.48,390.55 1152.52,390.55 1114.74,352.78
NetR8_1: R8.1 U1.39 U5.12 | length 2880.6
  Top Layer w10: v1(645,530) 645,600.85 1396.34,1352.19 1400.11,1352.19 v1(1420.72,1372.8) ; U1.39 v1(2050,2245)
  Bottom Layer w10: v1(1420.72,1372.8) 1422.92,1375 1903.79,1375 2050,1521.21 v1(2050,2245)
  Bottom Layer w20: R8.1 v1(645,530) 712.99,530 732.99,550 U5.12
NetR9_1: R9.1 U5.15 | length 223
  Bottom Layer w20: R9.1 712.99,680 732.99,700 U5.15
NetR10_2: R10.2 U1.33 U4.9 | length 1372.4
  Top Layer w10: U1.33 2125,1945 2160,1910 2160,1620 2045,1505 v1(2045,1070)
  Bottom Layer w10: 2044.43,965 2044.43,1069.43 v1(2045,1070)
  Bottom Layer w25: R10.2 2044.43,965 2062.97,946.46 2062.97,935.45 2098.43,900 U4.9
NetR11_1: R11.1 U1.32 U4.12 | length 1617.6
  Top Layer w10: U1.32 1977.38,1891.59 v1(2127.56,1891.59)
  Bottom Layer w10: v1(2127.56,1891.59) 2131.25,1891.59 2140.18,1882.66 2145,1882.66 2145,1518.37 2220,1443.37 2220,1298.7 2618.7,900 U4.12
  Bottom Layer w20: U4.12 R11.1
NetR12_1: R12.1 U4.15 | length 135.5
  Bottom Layer w20: U4.15 2672.24,750 2712.72,709.53 2737.44,709.53 2755,691.97 R12.1
NetU1_4: U1.4 U5.7 | length 2077.8
  Top Layer w10: v1(1145,505) 1105,545 1105,1000 v1(1390,1285) ; U1.4 1335,2145 1390,2090 v1(1390,1930)
  Bottom Layer w10: v1(1145,505) 1145,505.6 1163.66,524.26 1163.66,583.66 1230,650 U5.7 ; v1(1390,1285) v1(1390,1930)
NetU1_5: U1.5 U5.4 | length 1439.9
  Top Layer w10: U1.5 1296.81,2095 1360,2031.81 1360,1970 v2(1355,1965)
  Bottom Layer w10: U5.4 1253.46,800 1210,843.46 1210,1308.17 1320,1418.17 1320,1925 1355,1960 v2(1355,1965)
NetU1_6: U1.6 U5.17 | length 1551.3
  Top Layer w10: v2(1180,2000) 1180,2005 1220,2045 U1.6
  Bottom Layer w10: U5.17 786.54,800 860,873.46 860,1274.23 1222.25,1636.48 1222.25,1856.75 1180,1898.99 v2(1180,2000)
NetU1_7: U1.7 U5.16 | length 1508.4
  Top Layer w10: v2(1215,1945) 1223.19,1945 1273.19,1995 U1.7
  Bottom Layer w10: U5.16 786.54,750 875,838.46 875,1265 1237.25,1627.25 1237.25,1911.93 1215,1934.18 v2(1215,1945)
NetU1_12: U1.12 U5.2 | length 1057.5
  Top Layer w12: U1.12 v1(1360,1745)
  Bottom Layer w10: 1307.32,917.32 1307.32,907.31 1300.01,900 U5.2 1273.58,906.66 1241.8,906.66 1225.06,923.4 1225.06,1300.06 1355,1430 1355,1732.33 1357.39,1734.72 1357.39,1742.39 v1(1360,1745)
NetU1_15: U1.15 U5.14 | length 1208.1
  Top Layer w10: v1(1295,1525) 1295.51,1525 1354.49,1583.98 U1.15
  Bottom Layer w10: U5.14 786.54,650 891.89,755.35 891.89,1121.89 v1(1295,1525)
NetU1_17: U1.17 U4.4 | length 2374.7
  Top Layer w10: U1.17 1455,1595.28 v1(1455,1323.19)
  Bottom Layer w10: v1(1455,1323.19) 1491.81,1286.38 2145.09,1286.38 2513.35,918.12 2513.35,531.88 2507.49,526.02 2262.98,526.02 2241.49,547.52 2241.49,628.51 2220,650 U4.4
NetU1_18: U1.18 U4.17 | length 1807.9
  Top Layer w10: U1.18 1505,1595.28 v1(1505,1323.19)
  Bottom Layer w10: v1(1505,1323.19) 1526.81,1301.38 2151.3,1301.38 2530,922.68 2530,725 2600.66,654.34 2641.13,654.34 U4.17
NetU1_19: U1.19 U4.16 | length 1723.3
  Top Layer w10: U1.19 1555,1595.28 v1(1555,1323.19)
  Bottom Layer w10: v1(1555,1323.19) 2150.7,1323.19 2545,928.89 2545,755 2598.16,701.84 2643.63,701.84 U4.16
NetU1_20: U1.20 U4.2 | length 1602.8
  Top Layer w10: U1.20 1604.49,1394.67 1912.32,1086.83 1988.17,1086.83 2285,790 v1(2285,500)
  Bottom Layer w10: U4.2 2195.2,550 2245.2,500 v1(2285,500)
NetU1_34: U1.34 U4.14 | length 1569.7
  Top Layer w10: U1.34 2105,1995 2193.19,1906.81 v1(2193.19,1430)
  Bottom Layer w10: v1(2193.19,1430) 2193.19,1301.92 2560,935.1 2560,873.39 2605.79,827.6 2639.61,827.6 2645.47,821.74 U4.14
NetU1_35: U1.35 U4.7 | length 1483.9
  Top Layer w10: U1.35 2085,2045 2215,1915 v1(2215,970)
  Bottom Layer w10: U4.7 2152.42,800 2172.42,820 2207.81,820 2215,827.19 v1(2215,970)
RING_LIGHT_DI_3V3: U1.30 U6.3 | length 841
  Top Layer w10: U1.30 1986.69,1782.28 2052.72,1782.28 v2(2110,1725)
  Bottom Layer w10: v2(2110,1725) 2110,1819.93 2105.75,1824.18 2105.75,1903.29 2145.02,1942.56 2532.32,1942.56 2552.87,1922 2552.87,1901.77 U6.3
RING_LIGHT_DI_5V: J4.2 U6.4 | length 501.7
  Bottom Layer w10: U6.4 2555.59,1819.33 2625.79,1889.53 J4.2
SOLENOID_N: CR1.2 J14.2 Q1.4 | length 942
  Bottom Layer w20: CR1.2 539.5,2595.5 675,2460
  Bottom Layer w50: J14.2 675,2460 874.76,2460 Q1.4
SOLENOID_P: C10.2 C11.2 C12.2 C20.1 C26.1 CR1.1 J8.1 J14.1 J15.1 R4.1 U2.1 U4.6 U5.6 | length 11058.9
  Top Layer w12: 2535,2640 2535,2638.5 2548.5,2625 U2.1
  Top Layer w15: 2493.19,2693.19 2493.19,2818.41 2576.81,2902.03
  Top Layer w20: C12.2 2370.91,2730.47 2421.38,2680 2500.53,2680 2503.45,2682.92 ; C11.2 2455.91,2730.47 2493.19,2693.19 2503.45,2682.92 ; 2535,2640 2535,2651.38 ; C10.2 2535,2651.38 ; 2503.45,2682.92 2535,2651.38
  Top Layer w25: J14.1 190.97,2558.92 190.97,2610.97 775.77,3195.77 2591.26,3195.77 2885,2902.03 ; v3(2205,750) 2205,510 2250,465 2850,465 3182.05,797.05 3182.05,2705 ; 2576.81,2902.03 2885,2902.03 ; R4.1 2897.05,2420 3182.05,2705 ; J8.1 2977.5,2962.5 ; 2885,2902.03 2917.03,2902.03 2977.5,2962.5 ; 2977.5,2962.5 3097.5,2962.5 3182.05,2877.95 3182.05,2705
  Top Layer w120: v3(1219.1,698.96) 1251.04,698.96 1550,400 ; 1543.75,373.75 J15.1 1656,268.5 1656,304.97 2101.03,750 v3(2205,750) ; 1550,380 1550,400 ; v3(1550,600) 1550,400
  Bottom Layer w20: J14.1 363.43,2558.43 405,2600 405,2634.5 CR1.1
  Bottom Layer w40: C26.1 C26.1@1947.6,701.65
  Bottom Layer w45: C26.1@1947.6,701.65 1947.6,730.7
  Bottom Layer w50: 1550,705.85 1550,740 ; 1947.6,730.7 1947.6,734.24 1973.36,760 2074.63,760 2077.03,757.6 2087,757.6 2094.6,750 v3(2205,750)
  Bottom Layer w60: C20.1 1452.56,787.44 1502.56,787.44 1550,740
  Bottom Layer w80: v3(1550,600) 1550,705.85
SOLENOID_UNLOCK_HIGH: Q1.1 R2.1 U1.31 | length 2074.6
  Top Layer w10: U1.31 1986.69,1832.28 2052.21,1832.28 2145,1739.5 2145,1630 2022.14,1507.14 1986.43,1507.14 v2(1982.14,1502.86)
  Bottom Layer w10: Q1.1 1006.65,2165.28 1006.65,2108.35 1060,2055 ; R2.1 1060,2055 ; v2(1982.14,1502.86) 1974.49,1495.2 1711.01,1495.2 1458.89,1747.32 1458.89,1971.95 1375.85,2055 1060,2055
USB_D_N: J1.A7 J1.B7 U1.13 | length 1187.9
  Top Layer w10: J1.A7 308.11,1991.06 331.11,1991.06 339.84,1999.79 339.84,2019.89 331.11,2028.62 308.11,2028.62 J1.B7 ; J1.A7@326.28,1987.82 621.79,1987.82 932.11,1677.5 1255.69,1677.5 1273.19,1695 U1.13
USB_D_P: J1.A6 J1.B6 U1.14 | length 1207.9
  Top Layer w10: J1.A6 306.3,2008.94 283.3,2008.94 274.57,2000.21 274.57,1980.11 283.3,1971.38 306.3,1971.38 J1.B6 323.94,1970.47 326.28,1972.82 615.58,1972.82 925.89,1662.5 1255.69,1662.5 1273.19,1645 U1.14
VBUS: D1.1 J1.A4_B9 J1.B4_A9 | length 1237.6
  Top Layer w20: J1.B4_A9 378.28,1905.51 390,1893.8 390,1855 329.2,1794.2 248.4,1794.2 228.19,1814.41 228.19,2183.15 228.23,2183.19 228.23,2184.85 253.37,2210 341.77,2210 457.28,2094.49 ; J1.A4_B9 457.28,2094.49 ; D1.1@563.5,2093.27 562,2091.77 460,2091.77 457.28,2094.49
pads on no net: J1. J1.A8 J1.B8 J5.MH1 J5.MH2 J6.MH1 J6.MH2 J15.MH1 J15.MH2 P1.10 U3.4 U3.6 U3.7

## Polygon pours and split planes (outlines as drawn)
GND on Bottom Layer "GND_L02_P004" (solid, pour order 4): -5,-5.26 3356.85,-5.26 3356.85,3360 -5,3360
NetC18_2 on Bottom Layer "NETC18_2_L02_P000" (solid, pour order 0): 1367.5,725 1355.83,725 1323.76,692.93 1323.76,639.43 1229.43,639.43 1215,625 1215,560 1430,345 1525,345 1545,365 1545,490 1420,615 1420,725
NetC19_2 on Bottom Layer "NETC19_2_L02_P001" (solid, pour order 1): 745,645 745,295 940,100 1435,100 1510,175 1510,265 1410,365 1145,365 865,645
NetC24_2 on Bottom Layer "NETC24_2_L02_P002" (solid, pour order 2): 1945,810 1905,770 1905,540 1965,480 1965,360 1935,330 1865,330 1825,370 1825,814.53 1940.47,930 2125,930 2190,865 2190,830 2170,810 2085,810
NetC25_2 on Bottom Layer "NETC25_2_L02_P003" (solid, pour order 3): 2580,755 2610.47,724.53 2805.47,724.53 2865,665 2865,500 2800,435 2675,435 2135,435 2075,375 2075,160 2120,115 2850,115 2990,255 2990,800 2890,900 2625,900 2580,855
+5 on Top Layer "+5_L01_P009" (solid, pour order 9): 2170,3020 2170,2455 2340,2285 2645,2285 2645,2290 2795,2440 2795,2940 2680,3055 2205,3055

## Silkscreen, mask and mechanical layers (free items; w line width, h text height)
Top Overlay:
  drawing of 10 lines, arcs and shapes, not listed
  text "12V" at 3245,3010 h60 r90
  text "RESET" at 915,2795 h60
  text "BOOT" at 385,2790 h60
  text "5V" at 3245,2765 h60 r90
  text "SOL_P" at 335,2535 h60
  text "3V3" at 3240,2490 h60 r90
  text "SOL_N" at 330,2435 h60
  text "GND" at 3245,2200 h60 r90
  text "+5V" at 2675,1940 h60
  text "Data" at 2675,1840 h60
  text "GND" at 2675,1740 h60
  text "LIM1" at 365,1640 h60 r270
  text "RING LIGHT" at 3255,1580 h60 r90
  text "3V3" at 2715,1378.08 h60
  text "TX" at 2715,1278.08 h60
  text "LIM2" at 365,1266.67 h60 r270
  text "RX" at 2715,1178.08 h60
  text "ELOC LV Controller" at 635,1170 h80
  text "NFC" at 3265,1160 h60 r90
  text "GND" at 2715,1078.08 h60
  text "Dawson Kletke" at 640,1040 h60
  text "LIM3" at 365,893.33 h60 r270
  text "LIM4" at 365,528.33 h60 r270
  text "SLED" at 1085,375 h60 r270
  text "G" at 85,230 h60
  text "SPARE" at 2310,125 h60 r90
  text "1" at 1260,35 h60
  text "2" at 1355,35 h60
  text "12V" at 1560,35 h60
  text "G" at 1770,35 h60
  text "1" at 2015,35 h60
  text "2" at 2110,35 h60
Bottom Overlay:
  region: 1081 vertices and 2 holes, not listed, extent 531.28,1084.66 1211.25,1849.31
  text "SLED" at 1120,340 h60
  text "SPARE" at 2510,330 h60

## Text inside footprints (layer, text, board x,y; h text height)
CR1: Mechanical 13 "*" at 415.5,2665 h50 r180; Bottom Overlay "*" at 350,2665 h50 r180
J1: Mechanical 13 "PCB EDGE" at 21.57,1787.4 h16 r270
P1: Top Overlay "6" at 1660,2585 h50 r90; Top Overlay "10" at 1660,3145 h50 r90; Top Overlay "5" at 1760,3145 h50 r90; Top Overlay "1" at 1760,2585 h50 r90
U3: Top Overlay "*" at 2336,1282.5 h50 r90; Mechanical 13 "*" at 2374.5,1335.5 h50 r90